# Altium PCB Gate Driver Chip.PcbDoc
Units mm, origin at the board's own origin, x right, y up, seen from the top; angles counter-clockwise.
Board outline 152.4 x 101.6 mm, 2 copper layers (Top Layer, Bottom Layer); 18 components, 136 nets, 66 pads, 0 vias.
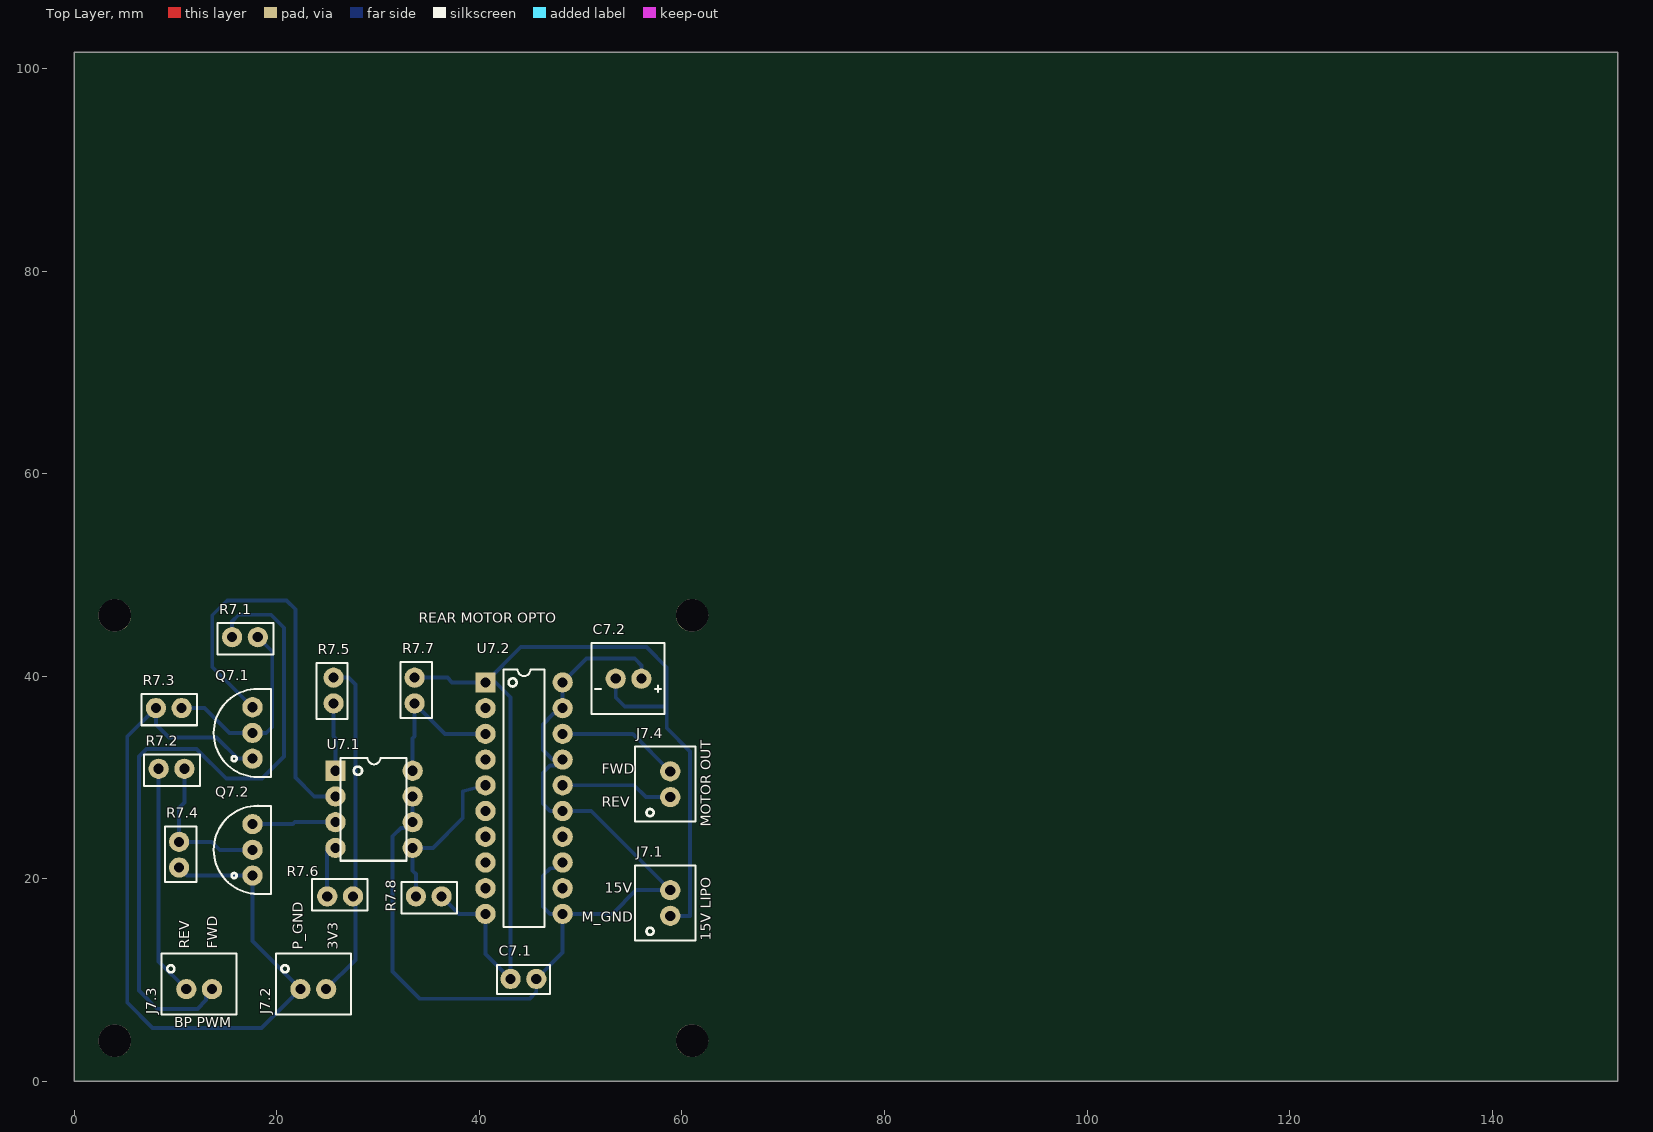
[diagram p0: Top Layer view]
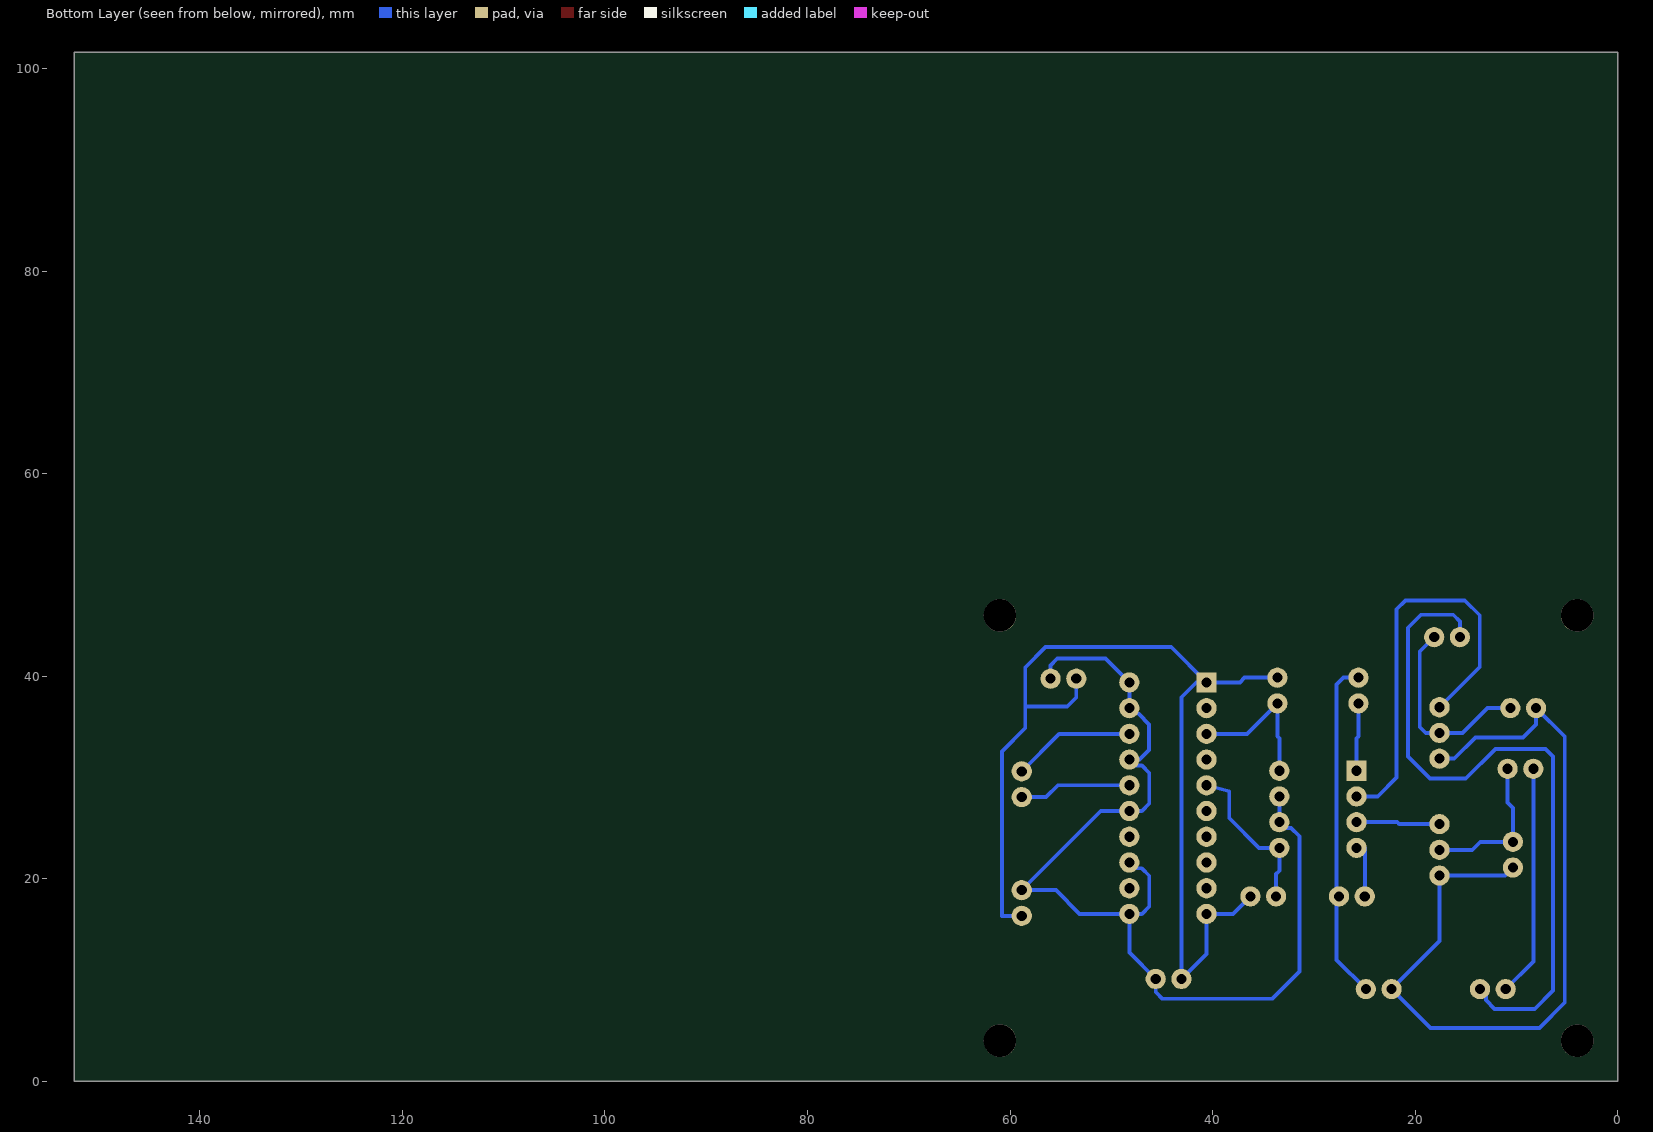
[diagram p1: Bottom Layer view, seen from below]
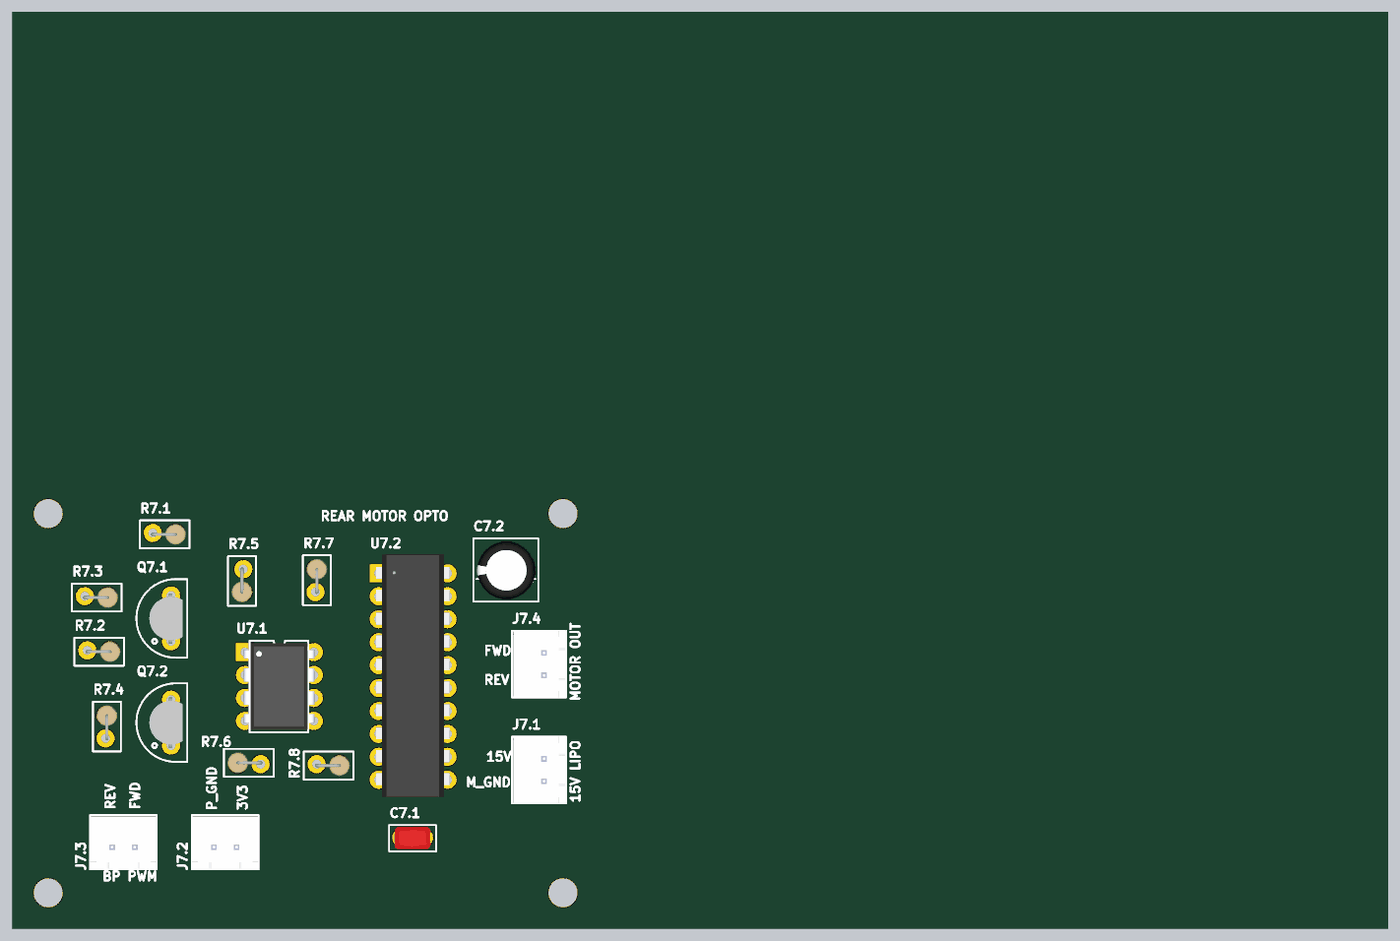
[diagram p2: 3D render of the assembled board from above, using the file's embedded part models]

## Layer stack, top to bottom
Top Solder: solder mask 0.0102, Solder Resist, Dk 3.5
Top Layer: signal copper 0.0356
Dielectric 1: dielectric 0.32, FR-4, Dk 4.8
Bottom Layer: signal copper 0.0356
Bottom Solder: solder mask 0.0102, Solder Resist, Dk 3.5

## Board outline
0,0 152.4,0 152.4,101.6 0,101.6

## Design rules (kind name [scope] priority, off if disabled: settings)
BoardOutlineClearance [All] p1: gap=0.3 ignorepadtopadclearanceinfootprint=FALSE
Clearance [All] p1: gap=0.762 ignorepadtopadclearanceinfootprint=FALSE
HoleSize [All] p1: absolutevalues=TRUE maxlimit=100 minlimit=0.4 maxpercent=80.000 minpercent=20.000
PolygonConnect [All] p1: connectstyle=Relief reliefconductorwidth=0.254 reliefentries=4 polygonreliefangle="90 Angle" airgapwidth=0.254
RoutingLayers [All] p1: top layer_v5=FALSE bottom layer_v5=TRUE
RoutingVias [All] p1: holewidth=0.711 width=1.27 viastyle="Through Hole" minholewidth=0.711 minwidth=1.27 maxholewidth=0.711 maxwidth=1.27
SolderMaskExpansion [All] p1: expansion=0.102 istentingtop=FALSE
UnRoutedNet [All] p1: checkbadconnections=TRUE
Width [All] p1: maxlimit=10 minlimit=0.381 preferedwidth=0.381
27 further rules are at their usual default settings.

## Components (designator, comment, footprint, x,y, rotation, side; value= is the part's Value field where it differs from the comment)
C7.1 "100p" "Non Polarized Cap" 44.35,10.1 r180 top
C7.2 "100u" "Polarized Cap" 54.73,39.75 r180 top
J7.1 "15V Lipo" "2pos JST" 58.85,17.6 r90 top
J7.2 "BP Power" "2pos JST" 23.6,9.1 r0 top
J7.3 "PWM BP" "2pos JST" 12.33,9.1 r0 top
J7.4 "PWM Out Motor" "2pos JST" 58.85,29.33 r90 top
Q7.1 "VN2222LL" VN2222LL 17.6,34.39 r90 top
Q7.2 "VN2222LL" VN2222LL 17.6,22.85 r90 top
R7.1 "1k" Res_Generic 16.85,43.85 r0 top
R7.2 "1k" Res_Generic 9.6,30.85 r0 top
R7.3 "10k" Res_Generic 9.33,36.85 r0 top
R7.4 "10k" Res_Generic 10.35,22.37 r90 top
R7.5 "330" Res_Generic 25.6,38.58 r270 top
R7.6 "330" Res_Generic 26.25,18.25 r180 top
R7.7 "1k" Res_Generic 33.6,38.58 r90 top
R7.8 "1k" Res_Generic 35,18.25 r0 top
U7.1 "MCT6" DIP8 29.6,26.85 r0 top
U7.2 "LT1161IN" DIP20 44.41,27.95 r0 top

## Footprints (in the part's own frame and the unit in brackets; to place one, negate y for a bottom-side part, rotate by r counter-clockwise, add the part's x,y. Pads: shape width x height; smd on the part's side, far side on the other; paste and mask are expansions set on the pad)
"2pos JST" [mm]
  round 2 hole 1: 1(-1.27,0) 2(1.27,0)
  silkscreen extent -3.7,-2.5 3.7,3.5, body extent -3.7,-2.4 3.7,3.35, height 7.01
DIP8 [mm]
  rect 2x2 hole 1: 1(-3.81,3.81)
  round 2 hole 1: 2(-3.81,1.27) 3(-3.81,-1.27) 4(-3.81,-3.81) 5(3.81,-3.81) 6(3.81,-1.27) 7(3.81,1.27) 8(3.81,3.81)
  silkscreen extent -3.3,-5.08 3.2,5.08, body extent -3.96,-4.79 3.91,4.79, height 5.33
DIP20 [mm]
  rect 2x2 hole 1: 1(-3.81,11.43)
  round 2 hole 1: 2(-3.81,8.89) 3(-3.81,6.35) 4(-3.81,3.81) 5(-3.81,1.27) 6(-3.81,-1.27) 7(-3.81,-3.81) 8(-3.81,-6.35) 9(-3.81,-8.89) 10(-3.81,-11.43) 11(3.81,-11.43) 12(3.81,-8.89) 13(3.81,-6.35) 14(3.81,-3.81) 15(3.81,-1.27) 16(3.81,1.27) 17(3.81,3.81) 18(3.81,6.35) 19(3.81,8.89) 20(3.81,11.43)
  silkscreen extent -2.04,-12.7 2.04,12.7, body extent -4.09,-13.39 4.04,13.53, height 3.81
"Non Polarized Cap" [mm] "Cap Generic THT"
  round 2 hole 1: 1(-1.27,0) 2(1.27,0)
  silkscreen extent -2.6,-1.4 2.6,1.5, body extent -2,-1.2 2,1.3, height 6
"Polarized Cap" [mm]
  round 2 hole 1: 1(-1.27,0) 2(1.27,0)
  silkscreen extent -3.53,-3.5 3.66,3.5, body extent -3.25,-3.22 3.25,3.28, height 11.37
Res_Generic [mm] "Cap Generic THT Footprint"
  round 2 hole 1: 1(-1.27,0) 2(1.27,0)
  silkscreen extent -2.71,-1.7 2.8,1.4, body extent -1.47,-1.3 2.4,1, height 8.18
VN2222LL [mm]
  round 2 hole 1: 1(-2.54,0) 2(0,0) 3(2.54,0)
  silkscreen extent -4.35,-1.8 4.35,3.83, body extent -2.78,-1.28 2.78,2.4, height 7.82

## Part data
C7.1: library part Cap_Generic
C7.2: library part "Polarized Cap"
J7.1 J7.2 J7.3 J7.4: library part "2pos Conn", "2pos Conn JST"
Q7.1 Q7.2: library part "VN2222LL NMOS", "VN2222LL N-Channel 60 V 150mA 400mW Through Hole TO-92 (TO-226)", Supplier Part Number 1=689-VN2222LL-G, Supplier 1=Mouser
R7.1 R7.2 R7.3 R7.4 R7.5 R7.6 R7.7 R7.8: library part Res_Generic
U7.1: library part "MCT6 Optocoupler", "Optoisolator 5.3KV 2CH TRANS 8-DIP", Supplier Part Number 1=512-MCT6, Supplier 1=Mouser
U7.2: library part "LT1161IN Gate Driver", "LT1161IN High-Side Gate Driver IC Non-Inverting 20-PDIP", Supplier Part Number 1=LT1161IN#PBF-ND, Supplier 1=Digi-Key

## Free pads (board coordinates)
  round 3.2 hole 3.2: ""(4,4) ""(4,46) ""(61,4) ""(61,46)

## Nets (pads, with @x,y where several pads share a name; then routed paths per layer and width w, separated by ;. In a path a pad name is that pad's centre, name@x,y a point inside that pad or via, vN(x,y) a via of type N, cw(c..) or ccw(c..) an arc to the next point about the centre after c; other vN are vias at no path point)
2.5V_GND: 
3.3V_P: J7.2.2 R7.5.1 R7.6.1 | length 34
  Bottom Layer w0.381: J7.2.2 27.749,11.979 27.762,18.25 R7.6.1@27.762,18.492 ; R7.5.1 27.072,39.85 27.762,39.16 R7.6.1@27.762,18.492 ; R7.6.1 R7.6.1@27.762,18.492
5V_ARM: 
5V_P: 
5V_SERVO: 
8V: 
15V: C7.1.1 C7.2.1 J7.1.2 U7.1.6 U7.1.7 U7.2.11 U7.2.13 U7.2.15 U7.2.17 U7.2.19 U7.2.20 | length 104.2
  Bottom Layer w0.381: U7.1.7 U7.1.6 32.834,25.004 32.245,25.004 31.432,24.191 31.432,10.831 34.125,8.138 44.945,8.138 45.62,8.813 C7.1.1 48.22,12.7 U7.2.11 ; U7.2.13 47.644,21.024 46.99,21.024 46.253,20.288 46.253,17.257 46.99,16.52 U7.2.11 ; C7.2.1 56,41.065 55.34,41.725 50.565,41.725 U7.2.20 U7.2.19 47.282,36.256 46.266,35.24 46.266,32.7 47.206,31.76 U7.2.17 47.644,31.184 46.99,31.184 46.253,30.448 46.253,27.417 46.99,26.68 U7.2.15 51.04,26.68 J7.1.2 55.478,18.87 53.128,16.52 U7.2.11
ARM_SERV_BP_OUT: 
ARM_SERV_PWM: 
BOX_SERV_BP_OUT: 
BOX_SERV_PWM: 
BRIDGE_SERV_BP_OUT: 
BRIDGE_SERV_PWM: 
CLAW_SERV_BP_OUT: 
CLAW_SERV_PWM: 
DCLK: 
DIO: 
ECHO_F_M: 
ECHO_S_L: 
ECHO_S_R: 
ECHO_SPARE: 
ENCODER_L_I: 
ENCODER_L_Q: 
ENCODER_R_I: 
ENCODER_R_Q: 
FWD: J7.4.2 U7.2.18 | length 12.2
  Bottom Layer w0.381: U7.2.18 55.15,34.3 J7.4.2
FWD_BP_OUT: J7.3.2 R7.1.1 | length 69.1
  Bottom Layer w0.381: J7.3.2 13.017,8.517 13.017,8.01 12.154,7.146 8.191,7.146 6.377,8.96 6.377,32.065 7.115,32.803 12.076,32.803 14.998,29.881 18.529,29.881 20.696,32.047 20.696,44.783 19.418,46.06 16.24,46.06 15.58,45.4 R7.1.1
IR_LEFT_TRANS: 
IR_RIGHT_TRANS: 
IR_SNS_LEFT: 
IR_SNS_RIGHT: 
LEFT+: 
LEFT-: 
LEFT_FWD: 
LEFT_FWD_BP_OUT: 
LEFT_REV: 
LEFT_REV_BP_OUT: 
M_GND: C7.1.2 C7.2.2 J7.1.1 R7.7.2 R7.8.2 U7.2.1 U7.2.10 | length 105.5
  Bottom Layer w0.381: R7.7.2 36.842,39.85 37.312,39.38 U7.2.1 ; R7.8.2 38,16.52 U7.2.10 40.6,12.58 C7.1.2 43.08,37.914 41.614,39.38 U7.2.1 ; C7.2.2 53.46,37.89 54.35,37 58.496,37 ; J7.1.1 60.808,16.33 60.808,32.556 58.496,34.867 58.496,37 ; U7.2.1 44.088,42.868 56.49,42.868 58.496,40.862 58.496,37
MAGNET_SNS: 
NetC1.8_2: 
NetC5.1_1: 
NetC5.1_2: 
NetC5.2_1: 
NetC5.2_2: 
NetC5.3_1: 
NetC5.4_1: 
NetQ2.1_2: 
NetQ2.1_3: 
NetQ2.2_2: 
NetQ2.2_3: 
NetQ2.3_2: 
NetQ2.3_3: 
NetQ2.4_2: 
NetQ2.4_3: 
NetQ3.1_2: 
NetQ3.1_3: 
NetQ3.2_2: 
NetQ3.2_3: 
NetQ3.3_2: 
NetQ3.3_3: 
NetQ3.4_2: 
NetQ3.4_3: 
NetQ3.5_1: 
NetQ3.6_1: 
NetQ3.7_1: 
NetQ3.8_1: 
NetQ7.1_2: Q7.1.2 R7.1.2 R7.3.2 | length 19.7
  Bottom Layer w0.381: R7.3.2 12.865,36.85 15.325,34.39 Q7.1.2 18.957,34.39 19.553,34.986 19.553,42.417 R7.1.2
NetQ7.1_3: Q7.1.3 U7.1.2 | length 41.3
  Bottom Layer w0.381: Q7.1.3 13.627,40.903 13.627,46.01 15.1,47.483 20.956,47.483 21.839,46.6 21.839,29.975 23.693,28.12 U7.1.2
NetQ7.2_2: Q7.2.2 R7.2.2 R7.4.2 | length 15
  Bottom Layer w0.381: R7.2.2 10.87,27.505 10.35,26.985 R7.4.2 13.576,23.64 14.366,22.85 Q7.2.2
NetQ7.2_3: Q7.2.3 U7.1.3 | length 8.3
  Bottom Layer w0.381: Q7.2.3 21.577,25.39 21.767,25.58 U7.1.3
NetR2.3_2: 
NetR2.6_2: 
NetR2.7_1: 
NetR2.8_1: 
NetR2.13_2: 
NetR2.14_2: 
NetR2.15_2: 
NetR2.16_2: 
NetR3.3_2: 
NetR3.4_1: 
NetR3.5_1: 
NetR3.6_2: 
NetR3.11_2: 
NetR3.12_2: 
NetR3.13_1: 
NetR3.14_2: 
NetR4.11_2: 
NetR4.13_2: 
NetR4.15_2: 
NetR4.17_2: 
NetR4.19_2: 
NetR5.2_1: 
NetR5.4_2: 
NetR5.7_1: 
NetR5.9_2: 
NetR5.15_1: 
NetR6.3_2: 
NetR7.5_2: R7.5.2 U7.1.1 | length 6.7
  Bottom Layer w0.381: R7.5.2 25.6,34.058 25.79,33.868 U7.1.1
NetR7.6_2: R7.6.2 U7.1.4 | length 5.6
  Bottom Layer w0.381: R7.6.2 24.968,18.262 24.968,23.04 U7.1.4
NetR7.7_1: R7.7.1 U7.1.8 U7.2.3 | length 15
  Bottom Layer w0.381: U7.1.8 33.41,33.868 33.6,34.058 R7.7.1 36.61,34.3 U7.2.3
NetR7.8_1: R7.8.1 U7.1.5 U7.2.5 | length 16.1
  Bottom Layer w0.381: R7.8.1 33.73,20.466 33.41,20.786 U7.1.5 35.42,23.04 38.35,25.97 38.35,28.627 U7.2.5
P_GND: J7.2.1 Q7.1.1 Q7.2.1 R7.3.1 R7.4.1 | length 83.3
  Bottom Layer w0.381: R7.4.1 11.14,20.31 Q7.2.1 17.6,13.83 J7.2.1 18.497,5.267 7.734,5.267 5.234,7.766 5.234,34.024 R7.3.1 8.06,35.24 9.354,33.946 14.043,33.946 16.139,31.85 Q7.1.1
REF_F_L_COL: 
REF_F_L_LED: 
REF_F_L_SNS: 
REF_F_M_COL: 
REF_F_M_LED: 
REF_F_M_SNS: 
REF_F_R_COL: 
REF_F_R_LED: 
REF_F_R_SNS: 
REF_R_COL: 
REF_R_LED: 
REF_R_SNS: 
REF_S_L_COL: 
REF_S_L_LED: 
REF_S_L_SNS: 
REF_S_R_COL: 
REF_S_R_LED: 
REF_S_R_SNS: 
REV: J7.4.1 U7.2.16 | length 11.1
  Bottom Layer w0.381: U7.2.16 55.296,29.22 56.456,28.06 J7.4.1
REV_BP_OUT: J7.3.1 R7.2.1 | length 22.9
  Bottom Layer w0.381: R7.2.1 8.33,11.83 J7.3.1
RIGHT+: 
RIGHT-: 
RIGHT_FWD: 
RIGHT_FWD_BP_OUT: 
RIGHT_REV: 
RIGHT_REV_BP_OUT: 
SPARE_1: 
SW_CLAW+: 
SW_CLAW_SNS: 
SW_FRONT+: 
SW_FRONT_SNS: 
SW_REAR+: 
SW_REAR_SNS: 
TRIG_COM: 
pads on no net: U7.2.2 U7.2.4 U7.2.6 U7.2.7 U7.2.8 U7.2.9 U7.2.12 U7.2.14

## Silkscreen, mask and mechanical layers (free items; w line width, h text height)
Top Overlay:
  text "REAR MOTOR OPTO" at 34.004,45.254 h1
  text "FWD" at 52.104,30.354 h1
  text "REV" at 52.104,27.104 h1
  text "MOTOR OUT" at 62.846,25.104 h1 r90
  text "15V" at 52.354,18.604 h1
  text "M_GND" at 50.104,15.771 h1
  text "15V LIPO" at 62.846,13.854 h1 r90
  text "REV" at 11.346,13.104 h1 r90
  text "FWD" at 14.096,13.104 h1 r90
  text "P_GND" at 22.579,13.004 h1 r90
  text "3V3" at 25.996,13.004 h1 r90
  text "BP PWM" at 9.854,5.354 h1
Mechanical 1:
  the board outline again, w0.2